# Altium PCB Inverter - Copy.PcbDoc (part 1 of 2)
Units mm, origin at the board's own origin, x right, y up, seen from the top; angles counter-clockwise.
Board outline 150 x 100 mm, 2 copper layers (Top Layer, Bottom Layer), stack 1.74 mm thick; 289 components, 202 nets, 1845 pads, 676 vias.
Unrouted connection lines stored in the file: 683.
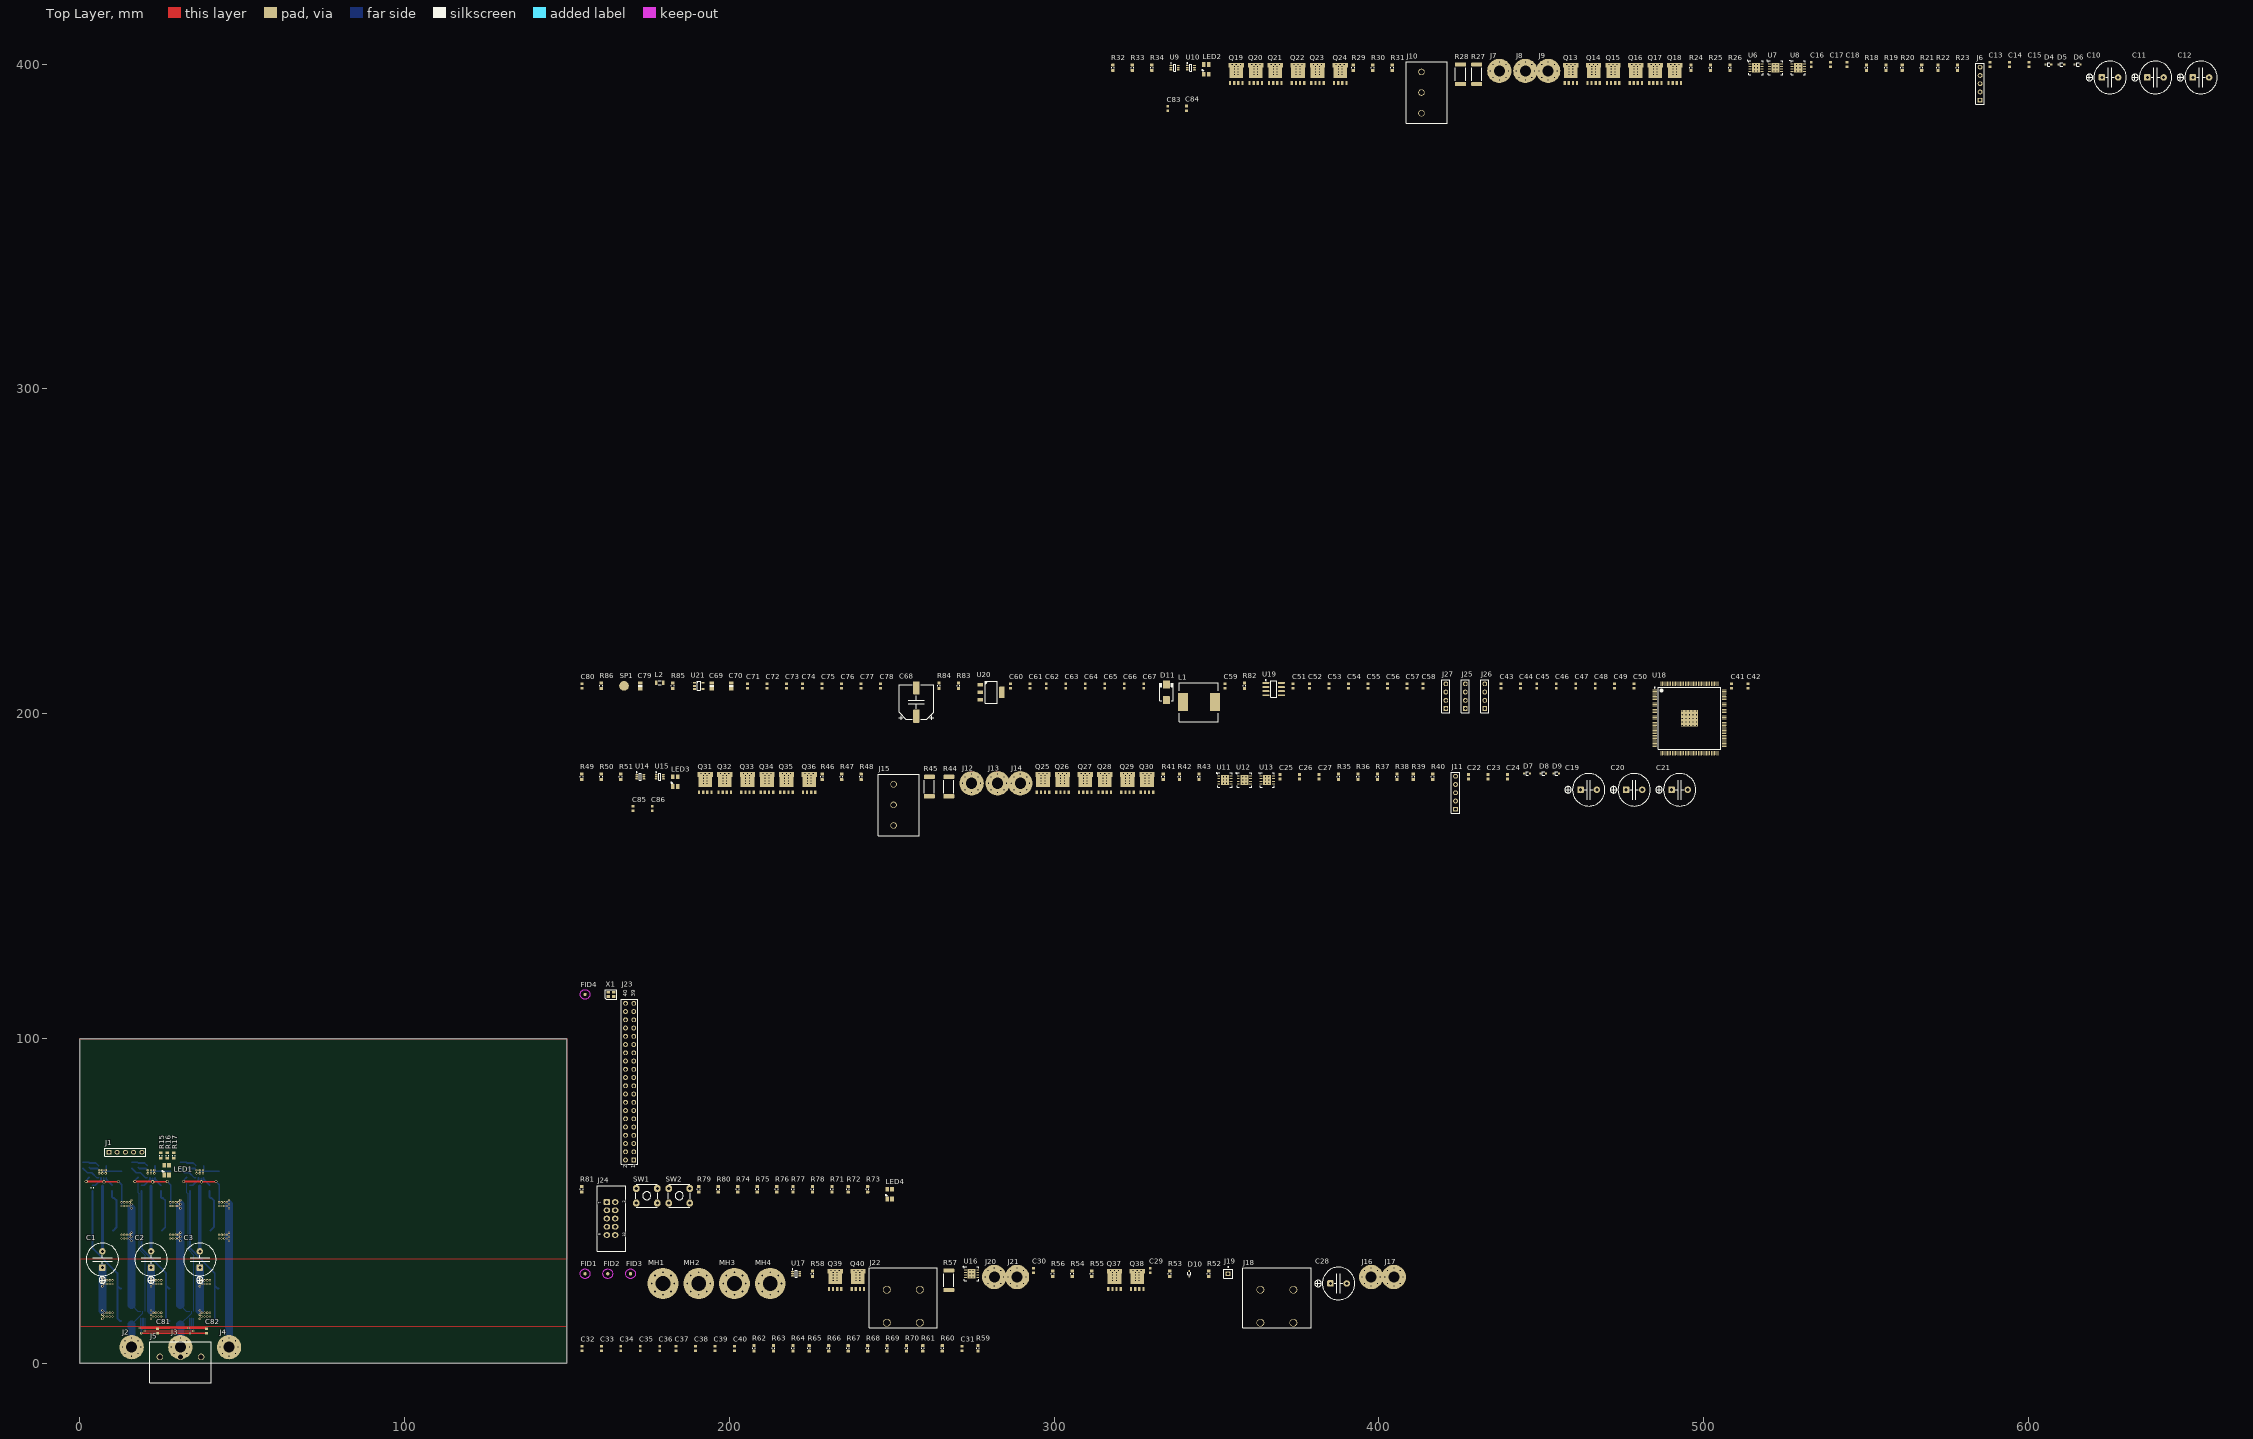
[diagram p0: Top Layer view]
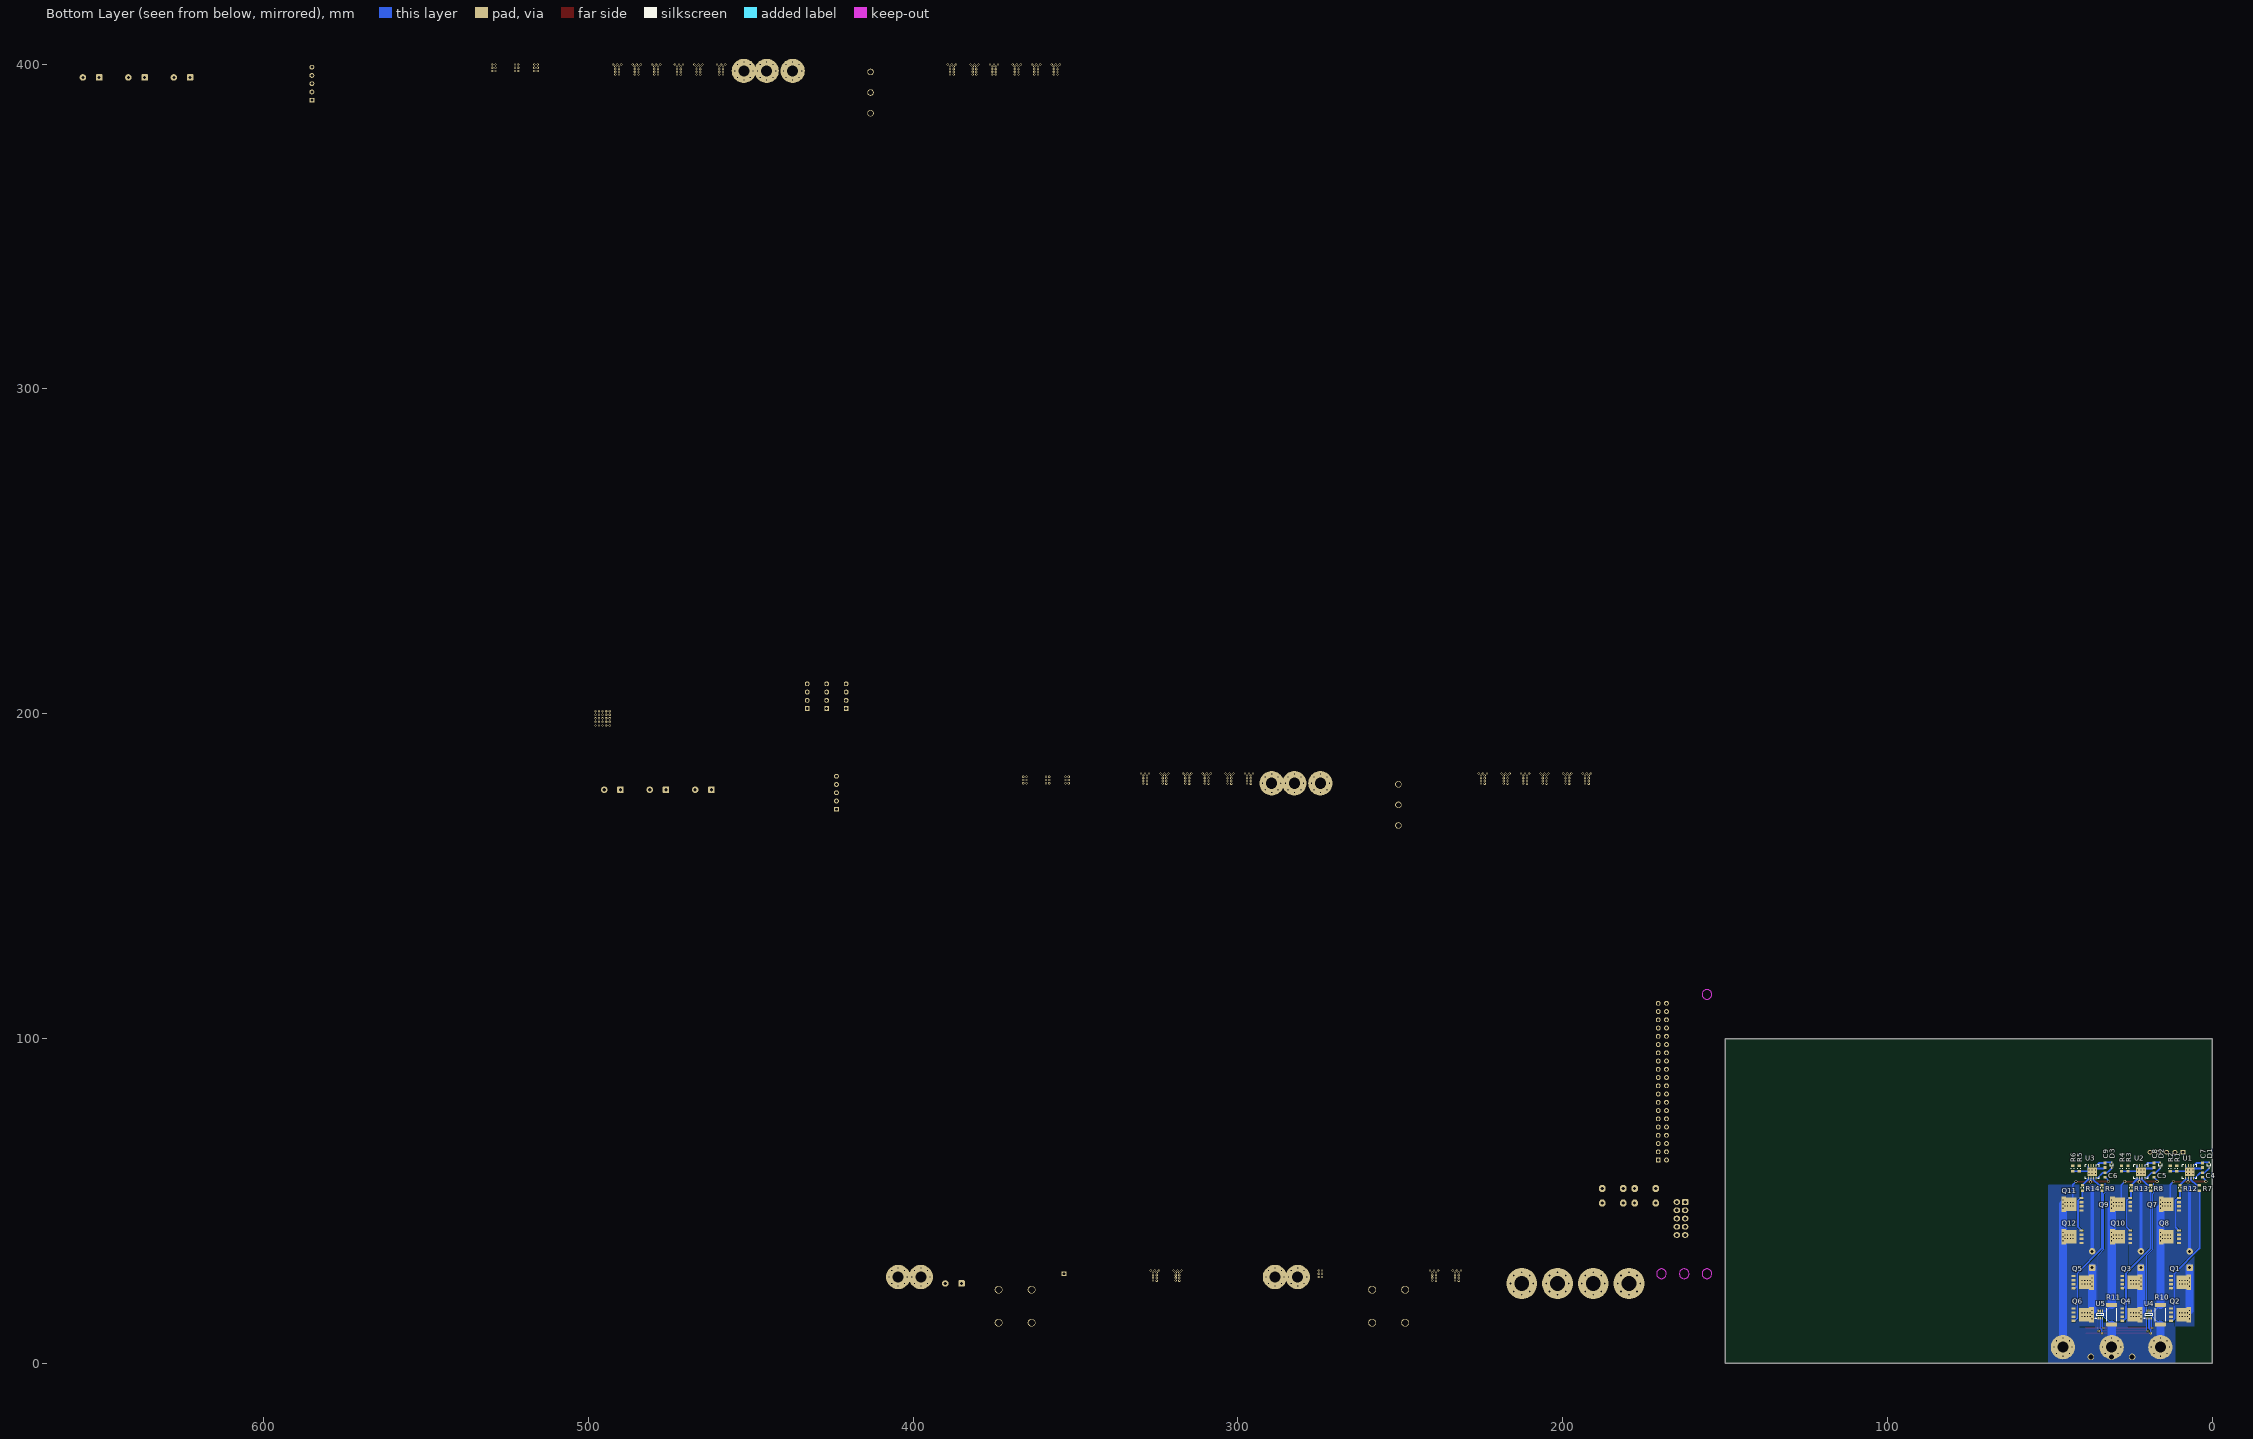
[diagram p1: Bottom Layer view, seen from below]

## Layer stack, top to bottom
Top Solder: solder mask 0.0102, Solder Resist, Dk 3.5
Top Layer: signal copper 0.07
Dielectric 1: dielectric 1.6, FR-4, Dk 4.8
Bottom Layer: signal copper 0.07
Bottom Solder: solder mask 0.0102, Solder Resist, Dk 3.5

## Board outline
0,0 150,0 150,100 0,100

## Design rules (kind name [scope] priority, off if disabled: settings)
AssemblyTestPointUsage SilkToBoardRegionClearance [All] p2:
Clearance HV_Clearance [InNetClass('HV')] p1: gap=0.2
Clearance [All] p2: gap=0.152
ComponentClearance ScrewTerminals [HasFootprint('MC000051') vs (HasFootprint('M3 Spade Hole'))] p1: gap=-10 collisioncheckmode=3 verticalgap=2540 showdistances=FALSE
ComponentClearance [All] p2: gap=0.254 collisioncheckmode=3 verticalgap=0.254 showdistances=FALSE
Height [All] p1: minheight=0 maxheight=30 prefheight=12.7
MatchedLengths DiffPair_DIFF100MatchedLengths [InDifferentialPairClass('DIFF100')] p1: tolerance=0.152 checknetsindiffpair=TRUE checkdiffpairvsdiffpair=FALSE checkothers=FALSE
MinimumSolderMaskSliver SilkscreenOverComponentPads_1 [All] p2: minsoldermaskwidth=0.254
MinimumSolderMaskSliver SilkToSolderMaskClearance [IsPad] p3: minsoldermaskwidth=0.254
MinimumSolderMaskSliver SilkscreenOverComponentPads [All] p4: minsoldermaskwidth=0.254
PolygonConnect [All] p1: connectstyle=Direct reliefconductorwidth=0.254 reliefentries=4 polygonreliefangle="90 Angle" airgapwidth=0.254
RoomDefinition FPGA [InComponentClass('FPGA')] p1: confinementstyle=ConfineIn formatcopy=TRUE lockcomponents=FALSE outline 153.6,59.6 172.6,59.6 172.6,118.6 153.6,118.6
RoomDefinition Power [InComponentClass('Power')] p2: confinementstyle=ConfineIn formatcopy=TRUE lockcomponents=FALSE outline 153.6,186.6 518.6,186.6 518.6,213.6 153.6,213.6
RoomDefinition Config [InComponentClass('Config')] p3: confinementstyle=ConfineIn formatcopy=TRUE lockcomponents=FALSE outline 153.6,33.6 254.6,33.6 254.6,58.6 153.6,58.6
RoomDefinition M1 [InComponentClass('M1')] p4: confinementstyle=ConfineIn formatcopy=TRUE lockcomponents=FALSE outline 317.1,380.9 659.1,380.9 659.1,403.9 317.1,403.9
RoomDefinition M0 [InComponentClass('M0')] p5: confinementstyle=ConfineIn formatcopy=TRUE lockcomponents=FALSE outline 0,-6 51,-6 51,70 0,70
RoomDefinition M2 [InComponentClass('M2')] p6: confinementstyle=ConfineIn formatcopy=TRUE lockcomponents=FALSE outline 153.6,161.6 498.6,161.6 498.6,185.6 153.6,185.6
RoomDefinition AuxhalfH [InComponentClass('AuxhalfH')] p7: confinementstyle=ConfineIn formatcopy=TRUE lockcomponents=FALSE outline 153.6,10.6 408.6,10.6 408.6,32.6 153.6,32.6
RoomDefinition Analouge [InComponentClass('Analouge')] p8: confinementstyle=ConfineIn formatcopy=TRUE lockcomponents=FALSE outline 153.6,2.6 280.6,2.6 280.6,9.6 153.6,9.6
RoutingVias [All] p1: holewidth=0.35 width=0.7 viastyle="Through Hole" minholewidth=0.3 minwidth=0.6 maxholewidth=1 maxwidth=1.4
SilkToBoardRegionClearance SilkToBoardRegionClearance_1 [All] p1:
SilkToSolderMaskClearance SilkToSolderMaskClearance_1 [IsPad] p1: minsilkscreentomaskgap=0.254 clearancetoexposedcopper=TRUE
SolderMaskExpansion [All] p1: expansion=0.102
UnpouredPolygon [All] p1: allowunpoured=FALSE
Width FatTraces [InNetClass('Fat Tracks')] p1: maxlimit=40 minlimit=0.3 preferedwidth=10
Width [All] p2: maxlimit=2.54 minlimit=0.152 preferedwidth=0.254
25 further rules are at their usual default settings.

## Classes and differential pairs
net class HV: DCBUS M0_PH_A M0_PH_B M0_PH_C M1_PH_A M1_PH_B M1_PH_C M2_PH_A M2_PH_B M2_PH_C NetC4_1 NetC4_2 NetC5_1 NetC5_2 NetC6_2 NetC13_1 NetC13_2 NetC14_1 NetC14_2 NetC15_2 NetC22_1 NetC22_2 NetC23_1 NetC23_2 NetC24_2 NetQ1_G NetQ3_G NetQ5_G NetQ7_G NetQ9_G NetQ11_G NetQ13_G NetQ15_G NetQ17_G NetQ19_G NetQ21_G NetQ23_G NetQ25_G NetQ27_G NetQ29_G NetQ31_G NetQ33_G NetQ35_G NetR7_2 NetR8_2 NetR9_2 NetR12_2 NetR13_2 NetR14_2 NetR24_2 NetR25_2 NetR26_2 NetR29_2 NetR30_2 NetR31_2 NetR41_2 NetR42_2 NetR43_2 NetR46_2 NetR47_2 NetR48_2
component class Analouge: C31 C32 C33 C34 C35 C36 C37 C38 C39 C40 R59 R60 R61 R62 R63 R64 R65 R66 R67 R68 R69 R70
component class AuxhalfH: C28 C29 C30 D10 FID1 FID2 FID3 J16 J17 J18 J19 J20 J21 J22 MH1 MH2 MH3 MH4 Q37 Q38 Q39 Q40 R52 R53 R54 R55 R56 R57 R58 U16 U17
component class Config: J24 LED4 R71 R72 R73 R74 R75 R76 R77 R78 R79 R80 R81 SW1 SW2
component class FPGA: FID4 J23 X1
component class M0: C1 C2 C3 C4 C5 C6 C7 C8 C9 C81 C82 D1 D2 D3 J1 J2 J3 J4 J5 LED1 Q1 Q2 Q3 Q4 Q5 Q6 Q7 Q8 Q9 Q10 Q11 Q12 R1 R2 R3 R4 R5 R6 R7 R8 R9 R10 R11 R12 R13 R14 R15 R16 R17 U1 U2 U3 U4 U5
component class M1: C10 C11 C12 C13 C14 C15 C16 C17 C18 C83 C84 D4 D5 D6 J6 J7 J8 J9 J10 LED2 Q13 Q14 Q15 Q16 Q17 Q18 Q19 Q20 Q21 Q22 Q23 Q24 R18 R19 R20 R21 R22 R23 R24 R25 R26 R27 R28 R29 R30 R31 R32 R33 R34 U6 U7 U8 U9 U10
component class M2: C19 C20 C21 C22 C23 C24 C25 C26 C27 C85 C86 D7 D8 D9 J11 J12 J13 J14 J15 LED3 Q25 Q26 Q27 Q28 Q29 Q30 Q31 Q32 Q33 Q34 Q35 Q36 R35 R36 R37 R38 R39 R40 R41 R42 R43 R44 R45 R46 R47 R48 R49 R50 R51 U11 U12 U13 U14 U15
component class Power: C41 C42 C43 C44 C45 C46 C47 C48 C49 C50 C51 C52 C53 C54 C55 C56 C57 C58 C59 C60 C61 C62 C63 C64 C65 C66 C67 C68 C69 C70 C71 C72 C73 C74 C75 C76 C77 C78 C79 C80 D11 J25 J26 J27 L1 L2 R82 R83 R84 R85 R86 SP1 U18 U19 U20 U21

## Components (designator, comment, footprint, x,y, rotation, side; value= is the part's Value field where it differs from the comment)
C1 "35ZLH680MEFC10X23" CAPE10.0MM_Rad_10x14mm 7,32 r90 top
C2 "35ZLH680MEFC10X23" CAPE10.0MM_Rad_10x14mm 22,32 r90 top
C3 "35ZLH680MEFC10X23" CAPE10.0MM_Rad_10x14mm 37,32 r90 top
C4 "MC0603X105K160" 1608[0603] 3,58 r90 bottom
C5 "MC0603X105K160" 1608[0603] 18,58 r90 bottom
C6 "MC0603X105K160" 1608[0603] 33,58 r90 bottom
C7 "MC0603X105K160" 1608[0603] 3,61 r90 bottom
C8 "MC0603X105K160" 1608[0603] 18,61 r90 bottom
C9 "MC0603X105K160" 1608[0603] 33,61 r90 bottom
C10 "35ZLH680MEFC10X23" CAPE10.0MM_Rad_10x14mm 625.1,395.9 r0 top
C11 "35ZLH680MEFC10X23" CAPE10.0MM_Rad_10x14mm 639.1,395.9 r0 top
C12 "35ZLH680MEFC10X23" CAPE10.0MM_Rad_10x14mm 653.1,395.9 r0 top
C13 "MC0603X105K160" 1608[0603] 588.1,399.9 r90 top
C14 "MC0603X105K160" 1608[0603] 594.1,399.9 r90 top
C15 "MC0603X105K160" 1608[0603] 600.1,399.9 r90 top
C16 "MC0603X105K160" 1608[0603] 533.1,399.9 r90 top
C17 "MC0603X105K160" 1608[0603] 539.1,399.9 r90 top
C18 "MC0603X105K160" 1608[0603] 544.1,399.9 r90 top
C19 "35ZLH680MEFC10X23" CAPE10.0MM_Rad_10x14mm 464.6,176.6 r0 top
C20 "35ZLH680MEFC10X23" CAPE10.0MM_Rad_10x14mm 478.6,176.6 r0 top
C21 "35ZLH680MEFC10X23" CAPE10.0MM_Rad_10x14mm 492.6,176.6 r0 top
C22 "MC0603X105K160" 1608[0603] 427.6,180.6 r90 top
C23 "MC0603X105K160" 1608[0603] 433.6,180.6 r90 top
C24 "MC0603X105K160" 1608[0603] 439.6,180.6 r90 top
C25 "MC0603X105K160" 1608[0603] 369.6,180.6 r90 top
C26 "MC0603X105K160" 1608[0603] 375.6,180.6 r90 top
C27 "MC0603X105K160" 1608[0603] 381.6,180.6 r90 top
C28 "35ZLH680MEFC10X23" CAPE10.0MM_Rad_10x14mm 387.6,24.6 r0 top
C29 "MC0603X105K160" 1608[0603] 329.6,28.6 r90 top
C30 "MC0603X105K160" 1608[0603] 293.6,28.6 r90 top
C31 "MC0603X105K160" 1608[0603] 271.6,4.6 r90 top
C32 "MC0603N221J500CT" 1608[0603] 154.6,4.6 r90 top
C33 "MC0603N221J500CT" 1608[0603] 160.6,4.6 r90 top
C34 "MC0603N221J500CT" 1608[0603] 166.6,4.6 r90 top
C35 "MC0603N221J500CT" 1608[0603] 172.6,4.6 r90 top
C36 "MC0603N221J500CT" 1608[0603] 178.6,4.6 r90 top
C37 "MC0603N221J500CT" 1608[0603] 183.6,4.6 r90 top
C38 "MC0603N221J500CT" 1608[0603] 189.6,4.6 r90 top
C39 "MC0603N221J500CT" 1608[0603] 195.6,4.6 r90 top
C40 "MC0603N221J500CT" 1608[0603] 201.6,4.6 r90 top
C41 "MC0603X105K160" 1608[0603] 508.6,208.6 r90 top
C42 "MC0603B104K160CT" 1608[0603] 513.6,208.6 r90 top
C43 "MC0603B104K160CT" 1608[0603] 437.6,208.6 r90 top
C44 "MC0603B104K160CT" 1608[0603] 443.6,208.6 r90 top
C45 "MC0603B104K160CT" 1608[0603] 448.6,208.6 r90 top
C46 "MC0603B104K160CT" 1608[0603] 454.6,208.6 r90 top
C47 "MC0603B104K160CT" 1608[0603] 460.6,208.6 r90 top
C48 "MC0603B104K160CT" 1608[0603] 466.6,208.6 r90 top
C49 "MC0603B104K160CT" 1608[0603] 472.6,208.6 r90 top
C50 "MC0603B104K160CT" 1608[0603] 478.6,208.6 r90 top
C51 "MC0603X105K160" 1608[0603] 373.6,208.6 r90 top
C52 "MC0603X105K160" 1608[0603] 378.6,208.6 r90 top
C53 "MC0603X105K160" 1608[0603] 384.6,208.6 r90 top
C54 "MC0603X105K160" 1608[0603] 390.6,208.6 r90 top
C55 "MC0603X105K160" 1608[0603] 396.6,208.6 r90 top
C56 "MC0603X105K160" 1608[0603] 402.6,208.6 r90 top
C57 "MC0603X105K160" 1608[0603] 408.6,208.6 r90 top
C58 "MC0603X105K160" 1608[0603] 413.6,208.6 r90 top
C59 "MC0603B471K500CT" 1608[0603] 352.6,208.6 r90 top
C60 "MC0603X105K160" 1608[0603] 286.6,208.6 r90 top
C61 "MC0603X105K160" 1608[0603] 292.6,208.6 r90 top
C62 "MC0603B104K160CT" 1608[0603] 297.6,208.6 r90 top
C63 "MC0603B104K160CT" 1608[0603] 303.6,208.6 r90 top
C64 "MC0603B104K160CT" 1608[0603] 309.6,208.6 r90 top
C65 "MC0603B104K160CT" 1608[0603] 315.6,208.6 r90 top
C66 "MC0603B104K160CT" 1608[0603] 321.6,208.6 r90 top
C67 "MC0603B104K160CT" 1608[0603] 327.6,208.6 r90 top
C68 "EEE1CA471P" CAP_ELEC_SIZE_G 257.6,203.6 r0 top
C69 "MC0805F106Z100CT" CAPC2012X135N 194.6,208.6 r90 top
C70 "MC0805F106Z100CT" CAPC2012X135N 200.6,208.6 r90 top
C71 "MC0603B104K160CT" 1608[0603] 205.6,208.6 r90 top
C72 "MC0603B104K160CT" 1608[0603] 211.6,208.6 r90 top
C73 "MC0603B104K160CT" 1608[0603] 217.6,208.6 r90 top
C74 "MC0603B104K160CT" 1608[0603] 222.6,208.6 r90 top
C75 "MC0603B104K160CT" 1608[0603] 228.6,208.6 r90 top
C76 "MC0603B104K160CT" 1608[0603] 234.6,208.6 r90 top
C77 "MC0603B104K160CT" 1608[0603] 240.6,208.6 r90 top
C78 "MC0603B104K160CT" 1608[0603] 246.6,208.6 r90 top
C79 "MC0805F106Z100CT" CAPC2012X135N 172.6,208.6 r90 top
C80 "MC0603X105K160" 1608[0603] 154.6,208.6 r90 top
C81 "MC0603B104K160CT" 1608[0603] 24,10 r90 top
C82 "MC0603B104K160CT" 1608[0603] 39,10 r90 top
C83 "MC0603B104K160CT" 1608[0603] 335,386.3 r90 top
C84 "MC0603B104K160CT" 1608[0603] 340.8,386.4 r90 top
C85 "MC0603B104K160CT" 1608[0603] 170.4,170.8 r90 top
C86 "MC0603B104K160CT" 1608[0603] 176.3,170.8 r90 top
D1 "RB521S30T1G" SOD523F 1,61 r90 bottom
D2 "RB521S30T1G" SOD523F 16,61 r90 bottom
D3 "RB521S30T1G" SOD523F 31,61 r90 bottom
D4 "RB521S30T1G" SOD523F 606.1,399.9 r0 top
D5 "RB521S30T1G" SOD523F 610.1,399.9 r0 top
D6 "RB521S30T1G" SOD523F 615.1,399.9 r0 top
D7 "RB521S30T1G" SOD523F 445.6,181.6 r0 top
D8 "RB521S30T1G" SOD523F 450.6,181.6 r0 top
D9 "RB521S30T1G" SOD523F 454.6,181.6 r0 top
D10 "RB521S30T1G" SOD523F 341.6,27.6 r90 top
D11 "SS13B" DO-214AA 334.6,206.6 r90 top
FID1 "FIDUCIAL" FIDUCIAL 155.6,27.6 r0 top
FID2 "FIDUCIAL" FIDUCIAL 162.6,27.6 r90 top
FID3 "FIDUCIAL" FIDUCIAL 169.6,27.6 r90 top
FID4 "FIDUCIAL" FIDUCIAL 155.6,113.6 r90 top
J1 "Header 5" HDR1X5 9,65 r0 top
J2 "M3" "M3 Spade Hole" 16,5 r0 top
J3 "M3" "M3 Spade Hole" 31,5 r0 top
J4 "M3" "M3 Spade Hole" 46,5 r0 top
J5 "MC000051" MC000051 24.7,2 r0 top
J6 "Header 5" HDR1X5 585.1,388.9 r90 top
J7 "M3" "M3 Spade Hole" 437.1,397.9 r0 top
J8 "M3" "M3 Spade Hole" 445.1,397.9 r0 top
J9 "M3" "M3 Spade Hole" 452.1,397.9 r0 top
J10 "MC000051" MC000051 413.1,384.9 r90 top
J11 "Header 5" HDR1X5 423.6,170.6 r90 top
J12 "M3" "M3 Spade Hole" 274.6,178.6 r0 top
J13 "M3" "M3 Spade Hole" 282.6,178.6 r0 top
J14 "M3" "M3 Spade Hole" 289.6,178.6 r0 top
J15 "MC000051" MC000051 250.6,165.6 r90 top
J16 "M3" "M3 Spade Hole" 397.6,26.6 r0 top
J17 "M3" "M3 Spade Hole" 404.6,26.6 r0 top
J18 "MC000232" MC000232 368.6,17.6 r0 top
J19 "Socket" PIN1 353.6,27.6 r0 top
J20 "M3" "M3 Spade Hole" 281.6,26.6 r0 top
J21 "M3" "M3 Spade Hole" 288.6,26.6 r0 top
J22 "MC000232" MC000232 253.6,17.6 r0 top
J23 "Header 20X2" HDR2X20 170.6,62.6 r90 top
J24 "shrouded box header" 10P_PCB_HEADER_BRD_MNT 163.6,44.6 r0 top
J25 "Header 4" HDR1X4 426.6,201.6 r90 top
J26 "Header 4" HDR1X4 432.6,201.6 r90 top
J27 "Header 4" HDR1X4 420.6,201.6 r90 top
L1 "MCSDRH125B-221MHF" "Inductor 12x12mm" 344.6,203.6 r0 top
L2 "2508056017Y2" FBC2012N 178.6,209.6 r0 top
LED1 "RGB" ASMB-MTB1 26,61 r0 top
LED2 "RGB" ASMB-MTB1 346.1,399.9 r0 top
LED3 "RGB" ASMB-MTB1 182.6,180.6 r0 top
LED4 "RGB" ASMB-MTB1 248.6,53.6 r0 top
MH1 "M4" MH_M4 179.6,24.6 r0 top
MH2 "M4" MH_M4 190.6,24.6 r0 top
MH3 "M4" MH_M4 201.6,24.6 r0 top
MH4 "M4" MH_M4 212.6,24.6 r0 top
Q1 "NTMFS4937NT1G" SO8FL#1 10,25 r270 bottom
Q2 "NTMFS4937NT1G" SO8FL#1 10,15 r270 bottom
Q3 "NTMFS4937NT1G" SO8FL#1 25,25 r270 bottom
Q4 "NTMFS4937NT1G" SO8FL#1 25,15 r270 bottom
Q5 "NTMFS4937NT1G" SO8FL#1 40,25 r270 bottom
Q6 "NTMFS4937NT1G" SO8FL#1 40,15 r270 bottom
Q7 "NTMFS4937NT1G" SO8FL#1 13,49 r90 bottom
Q8 "NTMFS4937NT1G" SO8FL#1 13,39 r90 bottom
Q9 "NTMFS4937NT1G" SO8FL#1 28,49 r90 bottom
Q10 "NTMFS4937NT1G" SO8FL#1 28,39 r90 bottom
Q11 "NTMFS4937NT1G" SO8FL#1 43,49 r90 bottom
Q12 "NTMFS4937NT1G" SO8FL#1 43,39 r90 bottom
Q13 "NTMFS4937NT1G" SO8FL#2 459.1,396.9 r0 top
Q14 "NTMFS4937NT1G" SO8FL#2 466.1,396.9 r0 top
Q15 "NTMFS4937NT1G" SO8FL#2 472.1,396.9 r0 top
Q16 "NTMFS4937NT1G" SO8FL#2 479.1,396.9 r0 top
Q17 "NTMFS4937NT1G" SO8FL#2 485.1,396.9 r0 top
Q18 "NTMFS4937NT1G" SO8FL#2 491.1,396.9 r0 top
Q19 "NTMFS4937NT1G" SO8FL#2 356.1,396.9 r0 top
Q20 "NTMFS4937NT1G" SO8FL#2 362.1,396.9 r0 top
Q21 "NTMFS4937NT1G" SO8FL#2 368.1,396.9 r0 top
Q22 "NTMFS4937NT1G" SO8FL#2 375.1,396.9 r0 top
Q23 "NTMFS4937NT1G" SO8FL#2 381.1,396.9 r0 top
Q24 "NTMFS4937NT1G" SO8FL#2 388.1,396.9 r0 top
Q25 "NTMFS4937NT1G" SO8FL#2 296.6,178.6 r0 top
Q26 "NTMFS4937NT1G" SO8FL#2 302.6,178.6 r0 top
Q27 "NTMFS4937NT1G" SO8FL#2 309.6,178.6 r0 top
Q28 "NTMFS4937NT1G" SO8FL#2 315.6,178.6 r0 top
Q29 "NTMFS4937NT1G" SO8FL#2 322.6,178.6 r0 top
Q30 "NTMFS4937NT1G" SO8FL#2 328.6,178.6 r0 top
Q31 "NTMFS4937NT1G" SO8FL#2 192.6,178.6 r0 top
Q32 "NTMFS4937NT1G" SO8FL#2 198.6,178.6 r0 top
Q33 "NTMFS4937NT1G" SO8FL#2 205.6,178.6 r0 top
Q34 "NTMFS4937NT1G" SO8FL#2 211.6,178.6 r0 top
Q35 "NTMFS4937NT1G" SO8FL#2 217.6,178.6 r0 top
Q36 "NTMFS4937NT1G" SO8FL#2 224.6,178.6 r0 top
Q37 "NTMFS4937NT1G" SO8FL#2 318.6,25.6 r0 top
Q38 "NTMFS4937NT1G" SO8FL#2 325.6,25.6 r0 top
Q39 "NTMFS4937NT1G" SO8FL#2 232.6,25.6 r0 top
Q40 "NTMFS4937NT1G" SO8FL#2 239.6,25.6 r0 top
R1 "MCMR06X3001FTL" RESC1608X55N#1 11,60 r90 bottom
R2 "MCMR06X3001FTL" RESC1608X55N#1 13,60 r90 bottom
R3 "MCMR06X3001FTL" RESC1608X55N#1 26,60 r90 bottom
R4 "MCMR06X3001FTL" RESC1608X55N#1 28,60 r90 bottom
R5 "MCMR06X3001FTL" RESC1608X55N#1 41,60 r90 bottom
R6 "MCMR06X3001FTL" RESC1608X55N#1 43,60 r90 bottom
R7 "MCWR06W1R00FTL" RESC1608X55N#2 4,54 r270 bottom
R8 "MCWR06W1R00FTL" RESC1608X55N#1 19,54 r90 bottom
R9 "MCWR06W1R00FTL" RESC1608X55N#1 34,54 r90 bottom
R10 "TLR3A20DR0005FTDG" RESC6332X70N 16,15 r90 bottom
R11 "TLR3A20DR0005FTDG" RESC6332X70N 31,15 r90 bottom
R12 "MCWR06W1R00FTL" RESC1608X55N#1 10,54 r90 bottom
R13 "MCWR06W1R00FTL" RESC1608X55N#1 25,54 r90 bottom
R14 "MCWR06W1R00FTL" RESC1608X55N#1 40,54 r90 bottom
R15 "MCWR06X3300FTL" RESC1608X55N#1 25,64 r90 top
R16 "MCWR06X3300FTL" RESC1608X55N#1 27,64 r90 top
R17 "MCWR06X3300FTL" RESC1608X55N#1 29,64 r90 top
R18 "MCMR06X3001FTL" RESC1608X55N#1 550.1,398.9 r90 top
R19 "MCMR06X3001FTL" RESC1608X55N#1 556.1,398.9 r90 top
R20 "MCMR06X3001FTL" RESC1608X55N#1 561.1,398.9 r90 top
R21 "MCMR06X3001FTL" RESC1608X55N#1 567.1,398.9 r90 top
R22 "MCMR06X3001FTL" RESC1608X55N#1 572.1,398.9 r90 top
R23 "MCMR06X3001FTL" RESC1608X55N#1 578.1,398.9 r90 top
R24 "MCWR06W1R00FTL" RESC1608X55N#1 496.1,398.9 r90 top
R25 "MCWR06W1R00FTL" RESC1608X55N#1 502.1,398.9 r90 top
R26 "MCWR06W1R00FTL" RESC1608X55N#1 508.1,398.9 r90 top
R27 "TLR3A20DR0005FTDG" RESC6332X70N 430.1,396.9 r90 top
R28 "TLR3A20DR0005FTDG" RESC6332X70N 425.1,396.9 r90 top
R29 "MCWR06W1R00FTL" RESC1608X55N#1 392.1,398.9 r90 top
R30 "MCWR06W1R00FTL" RESC1608X55N#1 398.1,398.9 r90 top
R31 "MCWR06W1R00FTL" RESC1608X55N#1 404.1,398.9 r90 top
R32 "MCWR06X3300FTL" RESC1608X55N#1 318.1,398.9 r90 top
R33 "MCWR06X3300FTL" RESC1608X55N#1 324.1,398.9 r90 top
R34 "MCWR06X3300FTL" RESC1608X55N#1 330.1,398.9 r90 top
R35 "MCMR06X3001FTL" RESC1608X55N#1 387.6,180.6 r90 top
R36 "MCMR06X3001FTL" RESC1608X55N#1 393.6,180.6 r90 top
R37 "MCMR06X3001FTL" RESC1608X55N#1 399.6,180.6 r90 top
R38 "MCMR06X3001FTL" RESC1608X55N#1 405.6,180.6 r90 top
R39 "MCMR06X3001FTL" RESC1608X55N#1 410.6,180.6 r90 top
R40 "MCMR06X3001FTL" RESC1608X55N#1 416.6,180.6 r90 top
R41 "MCWR06W1R00FTL" RESC1608X55N#1 333.6,180.6 r90 top
R42 "MCWR06W1R00FTL" RESC1608X55N#1 338.6,180.6 r90 top
R43 "MCWR06W1R00FTL" RESC1608X55N#1 344.6,180.6 r90 top
R44 "TLR3A20DR0005FTDG" RESC6332X70N 267.6,177.6 r90 top
R45 "TLR3A20DR0005FTDG" RESC6332X70N 261.6,177.6 r90 top
R46 "MCWR06W1R00FTL" RESC1608X55N#1 228.6,180.6 r90 top
R47 "MCWR06W1R00FTL" RESC1608X55N#1 234.6,180.6 r90 top
R48 "MCWR06W1R00FTL" RESC1608X55N#1 240.6,180.6 r90 top
R49 "MCWR06X3300FTL" RESC1608X55N#1 154.6,180.6 r90 top
R50 "MCWR06X3300FTL" RESC1608X55N#1 160.6,180.6 r90 top
R51 "MCWR06X3300FTL" RESC1608X55N#1 166.6,180.6 r90 top
R52 "MCMR06X1002FTL" RESC1608X55N#1 347.6,27.6 r90 top
R53 "MCMR06X1001FTL" RESC1608X55N#1 335.6,27.6 r90 top
R54 "MCMR06X3001FTL" RESC1608X55N#1 305.6,27.6 r90 top
R55 "MCMR06X3001FTL" RESC1608X55N#1 311.6,27.6 r90 top
R56 "MCWR06W1R00FTL" RESC1608X55N#1 299.6,27.6 r90 top
R57 "TLR3A20DR0005FTDG" RESC6332X70N 267.6,25.6 r90 top
R58 "MCWR06W1R00FTL" RESC1608X55N#1 225.6,27.6 r90 top
R59 "MCWR06W1R00FTL" RESC1608X55N#1 276.6,4.6 r90 top
R60 "MCMR06X1002FTL" RESC1608X55N#1 265.6,4.6 r90 top
R61 "MCMR06X1001FTL" RESC1608X55N#1 259.6,4.6 r90 top
R62 "MCWR06X3300FTL" RESC1608X55N#1 207.6,4.6 r90 top
R63 "MCWR06X3300FTL" RESC1608X55N#1 213.6,4.6 r90 top
R64 "MCWR06X3300FTL" RESC1608X55N#1 219.6,4.6 r90 top
R65 "MCWR06X3300FTL" RESC1608X55N#1 224.6,4.6 r90 top
R66 "MCWR06X3300FTL" RESC1608X55N#1 230.6,4.6 r90 top
R67 "MCWR06X3300FTL" RESC1608X55N#1 236.6,4.6 r90 top
R68 "MCWR06X3300FTL" RESC1608X55N#1 242.6,4.6 r90 top
R69 "MCWR06X3300FTL" RESC1608X55N#1 248.6,4.6 r90 top
R70 "MCWR06X3300FTL" RESC1608X55N#1 254.6,4.6 r90 top
R71 "MCWR06X3300FTL" RESC1608X55N#1 231.6,53.6 r90 top
R72 "MCWR06X3300FTL" RESC1608X55N#1 236.6,53.6 r90 top
R73 "MCWR06X3300FTL" RESC1608X55N#1 242.6,53.6 r90 top
R74 "MCMR06X1002FTL" RESC1608X55N#1 202.6,53.6 r90 top
R75 "MCMR06X1002FTL" RESC1608X55N#1 208.6,53.6 r90 top
R76 "MCMR06X1002FTL" RESC1608X55N#1 214.6,53.6 r90 top
R77 "MCMR06X1001FTL" RESC1608X55N#1 219.6,53.6 r90 top
R78 "MCMR06X1001FTL" RESC1608X55N#1 225.6,53.6 r90 top
R79 "MCMR06X1002FTL" RESC1608X55N#1 190.6,53.6 r90 top
R80 "MCMR06X1002FTL" RESC1608X55N#1 196.6,53.6 r90 top
R81 "MCMR06X1001FTL" RESC1608X55N#1 154.6,53.6 r90 top
R82 "ERJ3RQFR33V" RESC1608X55N#1 358.6,208.6 r90 top
R83 "MCMR06X3001FTL" RESC1608X55N#1 270.6,208.6 r90 top
R84 "MCMR06X1001FTL" RESC1608X55N#1 264.6,208.6 r90 top
R85 "MCMR06X1002FTL" RESC1608X55N#1 182.6,208.6 r90 top
R86 "MCMR06X1002FTL" RESC1608X55N#1 160.6,208.6 r90 top
SP1 "Star Point" StarpointWide 167.6,208.6 r0 top net-tie
SW1 "FSM4JH" FSM4JH 174.6,51.6 r0 top
SW2 "FSM4JH" FSM4JH 184.6,51.6 r0 top
U1 "LM5109BSD/NOPB" SON80P400X80_HS-9N 7,59 r270 bottom
U2 "LM5109BSD/NOPB" SON80P400X80_HS-9N 22,59 r270 bottom
U3 "LM5109BSD/NOPB" SON80P400X80_HS-9N 37,59 r270 bottom
U4 "INA199A1DCKR" TSOP65P210X110-6N 19.5,15 r90 bottom
U5 "INA199A1DCKR" TSOP65P210X110-6N 34.5,15 r90 bottom
U6 "LM5109BSD/NOPB" SON80P400X80_HS-9N 516.1,398.9 r0 top
U7 "LM5109BSD/NOPB" SON80P400X80_HS-9N 522.1,398.9 r0 top
U8 "LM5109BSD/NOPB" SON80P400X80_HS-9N 529.1,398.9 r0 top
U9 "INA199A1DCKR" TSOP65P210X110-6N 337.1,398.9 r0 top
U10 "INA199A1DCKR" TSOP65P210X110-6N 342.1,398.9 r0 top
U11 "LM5109BSD/NOPB" SON80P400X80_HS-9N 352.6,179.6 r0 top
U12 "LM5109BSD/NOPB" SON80P400X80_HS-9N 358.6,179.6 r0 top
U13 "LM5109BSD/NOPB" SON80P400X80_HS-9N 365.6,179.6 r0 top
U14 "INA199A1DCKR" TSOP65P210X110-6N 172.6,180.6 r0 top
U15 "INA199A1DCKR" TSOP65P210X110-6N 178.6,180.6 r0 top
U16 "LM5109BSD/NOPB" SON80P400X80_HS-9N 274.6,27.6 r0 top
U17 "INA199A1DCKR" TSOP65P210X110-6N 220.6,27.6 r0 top
U18 "10M08SAE144" SQFP50P2200X2200X165_HS-145N 495.6,198.6 r0 top
U19 "MC33063AQDRQ1" SO8_N 367.6,207.6 r0 top
U20 "AP1117E33G-13" SOT223 280.6,206.6 r0 top
U21 "LM3490IM5-12/NOPB" SOT23-5 190.6,208.6 r0 top
X1 "X1G0041710047" "SPXO SG-210STF" 163.6,113.6 r0 top

## Footprints (in the part's own frame and the unit in brackets; to place one, negate y for a bottom-side part, rotate by r counter-clockwise, add the part's x,y. Pads: shape width x height; smd on the part's side, far side on the other; paste and mask are expansions set on the pad)
10P_PCB_HEADER_BRD_MNT [mil] "HEADER BRD MNT 10POS 2.54MM"
  round 40 on Mech15: 0(0,0)
  rrect25% 80x68 hole 42: 1(-50,200)
  oval 80x68 hole 42: 2(50,200) 3(-50,100) 4(50,100) 5(-50,0) 6(50,0) 7(-50,-100) 8(50,-100) 9(-50,-200) 10(50,-200)
  silkscreen extent -165,-395 180,395, body extent -162,-394 178,394, height 390
1608[0603] [mm] "Chip Capacitor, Body 1.6x0.8mm, IPC High Density"
  rect 0.8x0.9 smd: 1(-0.7,0) 2(0.7,0)
  body extent -0.87,-0.48 0.87,0.48, height 1.3
ASMB-MTB1 [mm]
  rect 1.1x1.5 smd: 1(0,-3) 2(0,0) 3(1.5,0) 4(1.5,-3)
  silkscreen extent -0.5,-2 0,-1.5
CAP_ELEC_SIZE_G [mm] "Capacitor, polarized, aluminum can; 10.0x10.2mm DxH"
  round 0.635 on Mech15: 0(0,0)
  rrect25% 2x4.1 smd: 1(0,-4.35) 2(0,4.35)
  silkscreen extent -5.4,-5.4 5.4,5.3, body extent -5.25,-6 5.25,6, height 10.5
CAPC2012X135N [mm] "Chip Capacitor, Body 2.0x1.2mm, EIA 0805, IPC Medium Density"
  round 0.254 on Mech15: 0(0,0)
  rrect25% 1x1.4 smd: 1(-0.9,0) 2(0.9,0)
  Top Layer pour cut-out: -0.675,0.7 -0.475,0.9 0.475,0.9 0.675,0.7 0.675,-0.7 0.475,-0.9 -0.475,-0.9 -0.675,-0.7
  silkscreen extent -0.15,-0.65 0.15,0.65, body extent -1.1,-0.72 1.1,0.73, height 1.34
CAPE10.0MM_Rad_10x14mm [mm] "10mm Pitch Radial Capacitor 10x14mm DxH"
  round 0.5 on Mech15: 0(0,0)
  rrect25% 2x2 hole 0.965: 1(-2.5,0)
  round 2 hole 0.965: 2(2.5,0)
  silkscreen extent -7.37,-5 5,5, body extent -5.25,-5.24 5.21,5.24, height 13.99
DO-214AA [mm] "JEDEC DO214 variation AA. SMB"
  round 0.508 on Mech15: 0(0,0)
  rrect25% 2.5x2.2 smd: A(-2.4,0) K(2.4,0)
  silkscreen extent -2.54,-2.03 2.79,2.03, body extent -2.8,-1.97 2.8,1.98, height 2.62
FBC2012N [mm] "Ferrite Bead Chip, Body 2.0x1.2mm, 0805, IPC Medium Density"
  round 0.508 on Mech15: 0(0,0)
  rrect25% 0.8x1.35 smd: 1(-1.1,0) 2(1.1,0)
  silkscreen extent -0.43,-0.64 0.46,0.64, body extent -1,-0.62 1,0.63, height 0.9
FIDUCIAL [mm] "1mm fiducial with 3mm keepout"
  round 1 smd paste-1 mask+0.5: 0(0,0)
  Keep-Out Layer region: 0,-1.5 -0.574,-1.386 -1.061,-1.061 -1.386,-0.574 -1.5,0 -1.5,0 -1.386,0.574 -1.061,1.061 -0.574,1.386 0,1.5 0,1.5 0.574,1.386 1.061,1.061 1.386,0.574 1.5,0 1.5,0 1.386,-0.574 1.061,-1.061 0.574,-1.386 0,-1.5
FSM4JH [mm] "SWITCH, SPNO, 0.05A"
  oct 2.1x2.1 hole 0.965: 1(-3.25,-2.25) 1(3.25,-2.25) 2(-3.25,2.25) 2(3.25,2.25)
  silkscreen extent -3.4,-3.56 3.4,3.56
HDR1X4 [mm] "Connector; Header; 4 Position"
  rect 1.5x1.5 hole 0.9: 1(0,0)
  round 1.5 hole 0.9: 2(2.54,0) 3(5.08,0) 4(7.62,0)
  silkscreen extent -1.27,-1.27 8.89,1.27
HDR1X5 [mm] "Connector; Header; 5 Position"
  rect 1.5x1.5 hole 0.9: 1(0,0)
  round 1.5 hole 0.9: 2(2.54,0) 3(5.08,0) 4(7.62,0) 5(10.16,0)
  silkscreen extent -1.27,-1.27 11.43,1.27
HDR2X20 [mm] "Connector; Header; 20x2 Position"
  rect 1.5x1.5 hole 0.9: 1(0,0)
  round 1.5 hole 0.9: 2(0,2.54) 3(2.54,0) 4(2.54,2.54) 5(5.08,0) 6(5.08,2.54) 7(7.62,0) 8(7.62,2.54) 9(10.16,0) 10(10.16,2.54) 11(12.7,0) 12(12.7,2.54) 13(15.24,0) 14(15.24,2.54) 15(17.78,0) 16(17.78,2.54) 17(20.32,0) 18(20.32,2.54) 19(22.86,0) 20(22.86,2.54) 21(25.4,0) 22(25.4,2.54) 23(27.94,0) 24(27.94,2.54) 25(30.48,0) 26(30.48,2.54) 27(33.02,0) 28(33.02,2.54) 29(35.56,0) 30(35.56,2.54) 31(38.1,0) 32(38.1,2.54) 33(40.64,0) 34(40.64,2.54) 35(43.18,0) 36(43.18,2.54) 37(45.72,0) 38(45.72,2.54) 39(48.26,0) 40(48.26,2.54)
  silkscreen extent -1.27,-1.27 49.53,3.81
"Inductor 12x12mm" [mm]
  rect 3.1x5.5 smd: 1(-4.925,0) 2(4.925,0)
  silkscreen extent -6,-6 6,6
"M3 Spade Hole" [mm]
  round 7.5 hole 3.4: 1(0,0)
MC000051 [mm] "TERMINAL BLOCK, WIRE TO BRD, 3POS, 10AWG"
  round 2 hole 1.6: 1(0,0) 2(6.35,0) 3(12.7,0)
  silkscreen extent -3.15,-7.9 15.85,4.7
MC000232 [mm] "TERMINAL BLOCK, WIRE TO BRD, 2POS, 6AWG"
  round 2.4 hole 2: 1(-5.08,-5.08) 1(-5.08,5.08) 2(5.08,-5.08) 2(5.08,5.08)
  silkscreen extent -10.5,-6.7 10.5,11.8
MH_M4 [mm] "Plated and viad M4 mounting hole"
  round 9.5 hole 4.5: 1(0,0)
PIN1 [mm] "Connector; Plug"
  rect 1.5x1.5 hole 0.9: 1(0,0)
  silkscreen extent -1.4,-1.4 1.4,2.17
RESC1608X55N#1 [mm] "Chip Resistor, Body 1.6x0.8mm, EIA 0603, IPC Medium Density"
  round 0.254 on Mech15: 0(0,0)
  rrect25% 0.9x1 smd: 1(-0.85,0) 2(0.85,0)
  Top Layer pour cut-out: -0.6,0.5 -0.4,0.7 0.4,0.7 0.6,0.5 0.6,-0.5 0.4,-0.7 -0.4,-0.7 -0.6,-0.5
  silkscreen extent -0.15,-0.41 0.15,0.41, body extent -0.87,-0.47 0.88,0.48, height 0.54
RESC1608X55N#2 [mm] "Chip Resistor, Body 1.6x0.8mm, EIA 0603, IPC Medium Density"
  round 0.254 on Mech15: 0(0,0)
  rrect25% 0.9x1 smd: 1(0.85,0) 2(-0.85,0)
  Top Layer pour cut-out: 0.6,0.5 0.4,0.7 -0.4,0.7 -0.6,0.5 -0.6,-0.5 -0.4,-0.7 0.4,-0.7 0.6,-0.5
  body extent -0.88,-0.47 0.87,0.48, height 0.54
RESC6332X70N [mm] "Chip Resistor, Body 6.3x3.2mm, 2512, IPC Medium Density"
  round 1 on Mech15: 0(0,0)
  rrect25% 1.25x3.35 smd: 1(-3,0) 2(3,0)
  silkscreen extent -2,-1.58 2,1.58, body extent -3.3,-1.7 3.3,1.7, height 0.69
SO8_N [mm] "SOIC, 8-Leads, Body 4.9x3.9mm, Pitch 1.27mm, IPC Medium Density"
  oval 2.2x0.6 smd: 1(-2.4,1.905) 2(-2.4,0.635) 3(-2.4,-0.635) 4(-2.4,-1.905) 5(2.4,-1.905) 6(2.4,-0.635) 7(2.4,0.635) 8(2.4,1.905)
  silkscreen extent -2.52,-2.5 0.9,2.88, body extent -2,-2.5 2,2.5, height 1.75
SO8FL#1 [mm] "DFN5 5x6, 1.27P  (SO-8FL)  CASE 488AA"
  rect 0.9x0.6 on Bottom Paste: 7(0,-0.55) 7(0,0.3) 7(0,1.15) 7(0,2) 9(-1.15,-0.55) 9(-1.15,0.3) 9(-1.15,1.15) 9(-1.15,2) 10(1.15,-0.55) 10(1.15,0.3) 10(1.15,1.15) 10(1.15,2)
  rect 0.6x0.9 on Bottom Paste: 11(-1.875,3) 11(-0.65,3) 11(0.65,3) 11(1.875,3)
  rect 4.2x2.2 smd paste-10 mask+0.075: D(0,0) D(0,1.35)
  rect 4.7x1.5 smd paste-10 mask+0.075: D(0,2.75)
  rect 0.7x1.15 smd paste-0.05 mask+0.075: G(1.905,-2.725) S(-1.905,-2.725) S(-0.635,-2.725) S(0.635,-2.725)
  body extent -2.57,-2.95 2.58,3.2, height 1.13
SO8FL#2 [mm] "DFN5 5x6, 1.27P  (SO-8FL)  CASE 488AA"
  rect 0.9x0.6 on Top Paste: 7(0,-0.55) 7(0,0.3) 7(0,1.15) 7(0,2) 9(-1.15,-0.55) 9(-1.15,0.3) 9(-1.15,1.15) 9(-1.15,2) 10(1.15,-0.55) 10(1.15,0.3) 10(1.15,1.15) 10(1.15,2)
  rect 0.6x0.9 on Top Paste: 11(-1.875,3) 11(-0.65,3) 11(0.65,3) 11(1.875,3)
  rect 4.2x2.2 smd paste-10 mask+0.075: D(0,0) D(0,1.35)
  rect 4.7x1.5 smd paste-10 mask+0.075: D(0,2.75)
  rect 0.7x1.15 smd paste-0.05 mask+0.075: G(1.905,-2.725) S(-1.905,-2.725) S(-0.635,-2.725) S(0.635,-2.725)
  body extent -2.57,-2.95 2.58,3.2, height 1.13
SOD523F [mm] "SOD-523F; 2 Leads; Body 1.3 x 0.9 mm, (LxW)"
  round 0.508 on Mech15: 0(0,0)
  rrect20% 0.65x0.5 smd: A(0.9,0) K(-0.9,0)
  Top Layer pour cut-out: -0.725,-0.25 -0.725,0.25 -0.525,0.45 0.525,0.45 0.725,0.25 0.725,-0.25 0.525,-0.45 -0.525,-0.45
  silkscreen extent -0.25,-0.51 0.45,0.51, body extent -0.85,-0.45 0.85,0.45, height 0.7
SON80P400X80_HS-9N [mm] "SON, 8-Leads, Body 4.00x4.00mm, Pitch 0.80mm, Thermal Pad 3.00x2.49mm, IPC Medium Density"
  rect 0.9x0.3 smd mask+0: 1(-1.895,1.2) 2(-1.895,0.4) 3(-1.895,-0.4) 4(-1.895,-1.2) 5(1.895,-1.2) 6(1.895,-0.4) 7(1.895,0.4) 8(1.895,1.2)
  rect 2.49x3 smd paste-1.245 mask+0: 9(0,0)
  silkscreen extent -2.65,-2.2 2.2,2.25, body extent -2.05,-2.05 2.05,2.05, height 0.8
SOT23-5 [mm]
  round 0.5 on Mech15: 0(0,0)
  rrect25% 1x0.6 smd: 1(-1.3,0.95) 2(-1.3,0) 3(-1.3,-0.95) 4(1.3,-0.95) 5(1.3,0.95)
  silkscreen extent -0.51,-1.35 0.51,1.35, body extent -1.4,-1.45 1.4,1.45, height 1.44
SOT223 [mm] "SOT223 /SC-73"
  round 1 on Mech15: 0(0,0)
  rrect25% 1.75x1.1 smd: 1(-3.3,2.3) 2(-3.3,0) 3(-3.3,-2.3)
  rrect25% 1.75x3.5 smd: 4(3.3,0)
  silkscreen extent -1.85,-3.35 1.85,3.35, body extent -3.65,-3.35 3.65,3.35, height 1.8
"SPXO SG-210STF" [mm] "SPXO SG-210STF"
  rect 1.1x0.9 smd: 1(-0.85,-0.65) 2(0.85,-0.65) 3(0.85,0.65) 4(-0.85,0.65)
  silkscreen extent -1.8,-1.5 1.8,1.5
SQFP50P2200X2200X165_HS-145N [mm] "SQFP, 144-Leads, Body 20.00x20.00mm, Pitch 0.50mm, Thermal Pad 5.15x5.15mm, IPC Medium Density"
  oval 1.4x0.3 smd: 1(-10.7,8.75) 2(-10.7,8.25) 3(-10.7,7.75) 4(-10.7,7.25) 5(-10.7,6.75) 6(-10.7,6.25) 7(-10.7,5.75) 8(-10.7,5.25) 9(-10.7,4.75) 10(-10.7,4.25) 11(-10.7,3.75) 12(-10.7,3.25) 13(-10.7,2.75) 14(-10.7,2.25) 15(-10.7,1.75) 16(-10.7,1.25) 17(-10.7,0.75) 18(-10.7,0.25) 19(-10.7,-0.25) 20(-10.7,-0.75) 21(-10.7,-1.25) 22(-10.7,-1.75) 23(-10.7,-2.25) 24(-10.7,-2.75) 25(-10.7,-3.25) 26(-10.7,-3.75) 27(-10.7,-4.25) 28(-10.7,-4.75) 29(-10.7,-5.25) 30(-10.7,-5.75) 31(-10.7,-6.25) 32(-10.7,-6.75) 33(-10.7,-7.25) 34(-10.7,-7.75) 35(-10.7,-8.25) 36(-10.7,-8.75) 73(10.7,-8.75) 74(10.7,-8.25) 75(10.7,-7.75) 76(10.7,-7.25) 77(10.7,-6.75) 78(10.7,-6.25) 79(10.7,-5.75) 80(10.7,-5.25) 81(10.7,-4.75) 82(10.7,-4.25) 83(10.7,-3.75) 84(10.7,-3.25) 85(10.7,-2.75) 86(10.7,-2.25) 87(10.7,-1.75) 88(10.7,-1.25) 89(10.7,-0.75) 90(10.7,-0.25) 91(10.7,0.25) 92(10.7,0.75) 93(10.7,1.25) 94(10.7,1.75) 95(10.7,2.25) 96(10.7,2.75) 97(10.7,3.25) 98(10.7,3.75) 99(10.7,4.25) 100(10.7,4.75) 101(10.7,5.25) 102(10.7,5.75) 103(10.7,6.25) 104(10.7,6.75) 105(10.7,7.25) 106(10.7,7.75) 107(10.7,8.25) 108(10.7,8.75)
  oval 0.3x1.4 smd: 37(-8.75,-10.7) 38(-8.25,-10.7) 39(-7.75,-10.7) 40(-7.25,-10.7) 41(-6.75,-10.7) 42(-6.25,-10.7) 43(-5.75,-10.7) 44(-5.25,-10.7) 45(-4.75,-10.7) 46(-4.25,-10.7) 47(-3.75,-10.7) 48(-3.25,-10.7) 49(-2.75,-10.7) 50(-2.25,-10.7) 51(-1.75,-10.7) 52(-1.25,-10.7) 53(-0.75,-10.7) 54(-0.25,-10.7) 55(0.25,-10.7) 56(0.75,-10.7) 57(1.25,-10.7) 58(1.75,-10.7) 59(2.25,-10.7) 60(2.75,-10.7) 61(3.25,-10.7) 62(3.75,-10.7) 63(4.25,-10.7) 64(4.75,-10.7) 65(5.25,-10.7) 66(5.75,-10.7) 67(6.25,-10.7) 68(6.75,-10.7) 69(7.25,-10.7) 70(7.75,-10.7) 71(8.25,-10.7) 72(8.75,-10.7) 109(8.75,10.7) 110(8.25,10.7) 111(7.75,10.7) 112(7.25,10.7) 113(6.75,10.7) 114(6.25,10.7) 115(5.75,10.7) 116(5.25,10.7) 117(4.75,10.7) 118(4.25,10.7) 119(3.75,10.7) 120(3.25,10.7) 121(2.75,10.7) 122(2.25,10.7) 123(1.75,10.7) 124(1.25,10.7) 125(0.75,10.7) 126(0.25,10.7) 127(-0.25,10.7) 128(-0.75,10.7) 129(-1.25,10.7) 130(-1.75,10.7) 131(-2.25,10.7) 132(-2.75,10.7) 133(-3.25,10.7) 134(-3.75,10.7) 135(-4.25,10.7) 136(-4.75,10.7) 137(-5.25,10.7) 138(-5.75,10.7) 139(-6.25,10.7) 140(-6.75,10.7) 141(-7.25,10.7) 142(-7.75,10.7) 143(-8.25,10.7) 144(-8.75,10.7)
  rect 5.15x5.15 smd: 145(0,0)
  silkscreen extent -10.82,-9.6 9.6,9.6, body extent -10,-10 10,10, height 1.65
StarpointWide [mm] "Wide star point meant for connecting ground planes"
  round 3 smd paste-1.5 mask-1.5: 1(0,0) 2(0,0)
TSOP65P210X110-6N [mm] "TSOP, 6-Leads, Body 2.00x1.25mm, Pitch 0.65mm, IPC Medium Density"
  oval 0.85x0.4 smd: 1(-1.125,0.65) 2(-1.125,0) 3(-1.125,-0.65) 4(1.125,-0.65) 5(1.125,0) 6(1.125,0.65)
  silkscreen extent -1.25,-1.1 0.3,1.53, body extent -0.7,-1.1 0.7,1.1, height 1.1